# EAGLE board Bubbler Solenoid (EAGLE 6.4)
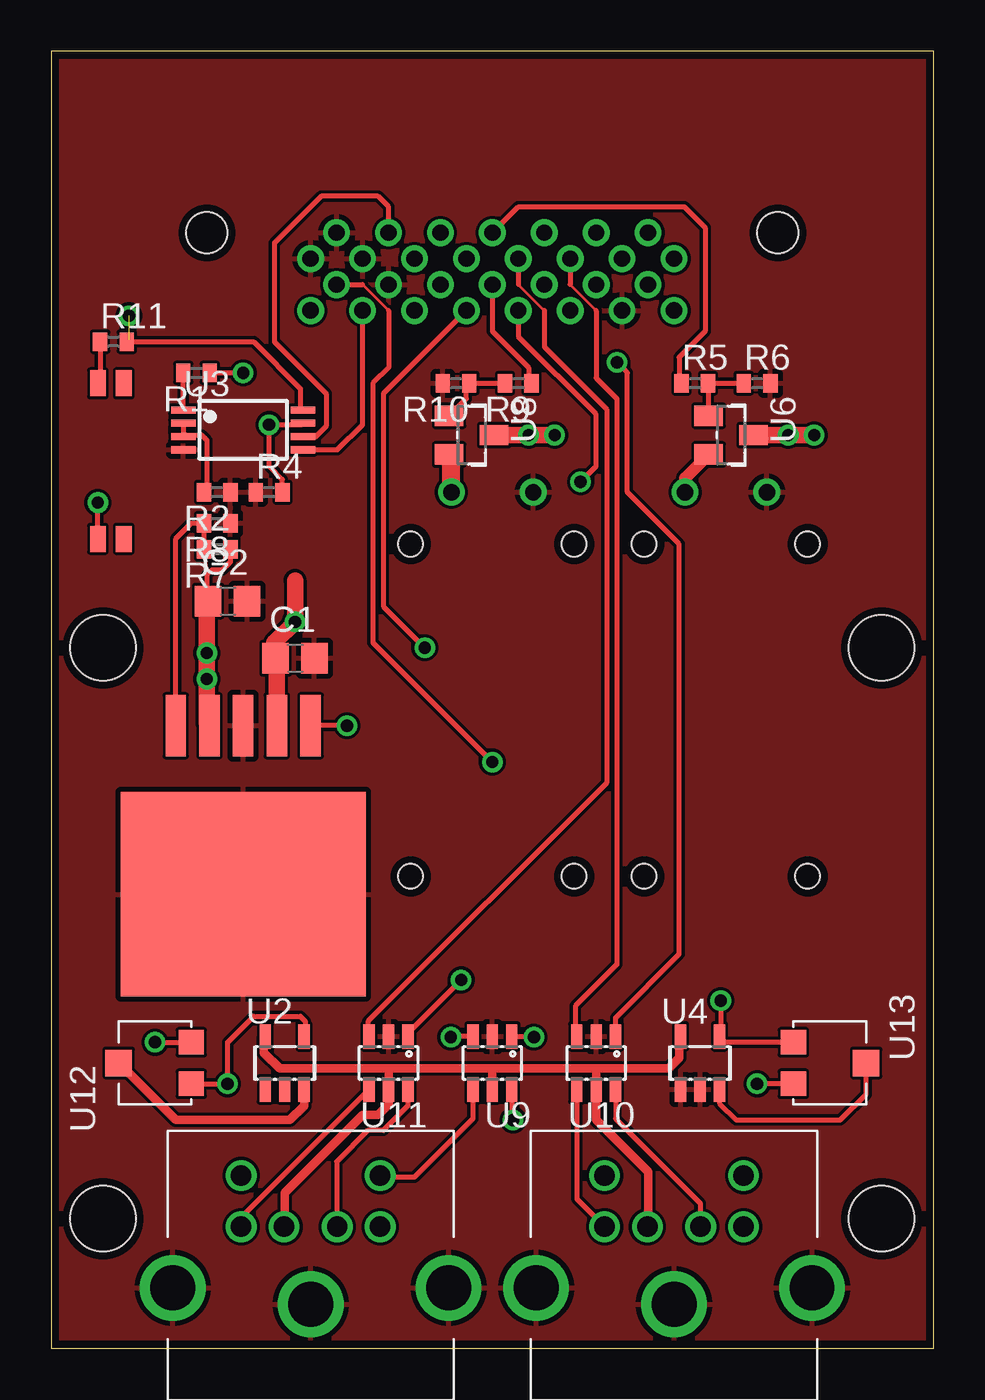
[diagram p0: board, top side]
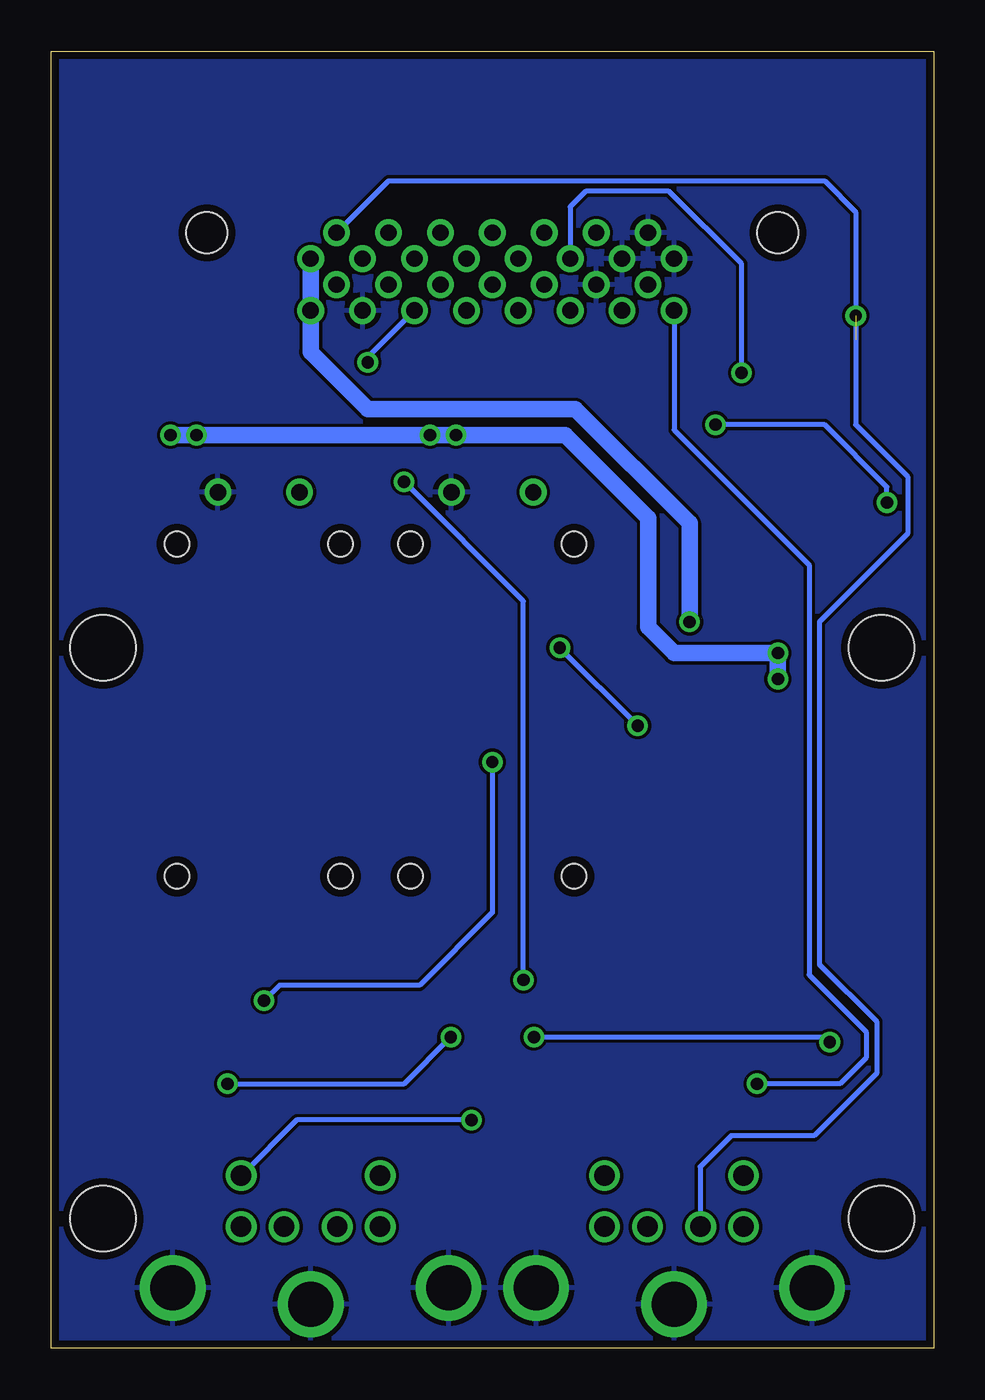
[diagram p1: board, bottom side, seen from below]

Size 43.18 x 63.5 mm. Coordinates in mm from the lower left corner, seen from the top.
Outline: 0,0 43.18,0 43.18,63.5 0,63.5 0,0
Copper layers (1*16): Top 0.035mm / dielectric 1.5mm / Bottom 0.035mm
Design rules "PDX (Prototyping)": minimum track width 6mil, minimum drill 13mil, track to track 6mil, track to pad 6mil, pad to pad 4mil, via to via 6mil, smd to smd 4mil, copper to edge 15mil, drill to drill 6mil, minimum pad ring 10mil, minimum via ring 8mil, stop-mask expansion 4mil, vias tented up to drill 0mil, thermal gap 10mil
Holes 3.2 mm at 2.54,34.29 40.64,34.29 2.54,6.35 40.64,6.35

## Footprints (pad centres in the part's own frame; a part is rotated, then mirrored left to right if it is on the bottom)
C0805 = smd 1.3 x 1.5: 1 -0.95,0; 2 0.95,0
R0402 = smd 0.7 x 0.9: 1 -0.65,0; 2 0.65,0
CONNECTOR-JAE-TX24-30M = drill 0.8: P1 -8.89,3.81; P2 -8.89,1.27; P3 -7.62,2.54; P4 -7.62,0; P5 -6.35,3.81; P6 -6.35,1.27; P7 -5.08,2.54; P8 -5.08,0; P9 -3.81,3.81; P10 -3.81,1.27; P11 -2.54,2.54; P12 -2.54,0; P13 -1.27,3.81; P14 -1.27,1.27; P15 0,2.54; P16 0,0; P17 1.27,3.81; P18 1.27,1.27; P19 2.54,2.54; P20 2.54,0; P21 3.81,3.81; P22 3.81,1.27; P23 5.08,2.54; P24 5.08,0; P25 6.35,3.81; P26 6.35,1.27; P27 7.62,2.54; P28 7.62,0; P29 8.89,3.81; P30 8.89,1.27 | hole 2: -13.97,0; 13.97,0
SOT23-5L = smd 0.55 x 1.2: 1 -0.95,-1.3; 2 0,-1.3; 3 0.95,-1.3; 4 0.95,1.3; 5 -0.95,1.3
TSSOP8 = smd 1.2 x 0.35: 1 -2.925,0.975; 2 -2.925,0.325; 3 -2.925,-0.325; 4 -2.925,-0.975; 5 2.925,-0.975; 6 2.925,-0.325; 7 2.925,0.325; 8 2.925,0.975
SWITCH-DIP-GDH-02 = smd 0.762 x 1.27: P1 0,0; P2 1.27,0; P3 1.27,7.62; P4 0,7.62
DUBLIB_SOT23 = smd 1 x 1.4: 1 -0.95,-1.1; 2 0.95,-1.1; 3 0,1.1
SOT23-6L = smd 0.55 x 1.2: 1 -0.95,-1.3; 2 0,-1.3; 3 0.95,-1.3; 4 0.95,1.3; 5 0,1.3; 6 -0.95,1.3
TC73X = smd 1.194 x 1.245: P$1 -1.016,-1.778; P$3 1.016,-1.778 | smd 1.295 x 1.295: P$2 0,1.778
KMDLX-6S-BS = drill 2.2: GND1 0,-4.7; GND2 -6.75,-5.5; GND3 6.75,-5.5 | drill 1: P1 1.3,-8.5; P2 -1.3,-8.5; P3 3.4,-8.5; P5 -3.4,-8.5; P6 3.4,-11; P8 -3.4,-11
P2PAK/A = smd 1 x 3: P1 0,0; P2 1.65,0; P3 3.3,0; P4 4.95,0; P5 6.6,0 | smd 12 x 10: PAD 3.3,8.25
PARKER-XVALVE-8MM = drill 0.8: P1 -2,0; P2 2,0 | hole 1.2: -4,-2.54; 4,-2.54; -4,-18.8; 4,-18.8

## Placement (x,y rotation side)
C1  [C0805]  11.94,33.78 0 top
C2  [C0805]  8.64,36.58 0 top
R1  10K  [R0402]  7.11,47.75 180 top
R2  10K  [R0402]  8.13,41.91 180 top
R4  10K  [R0402]  10.67,41.91 0 top
R5  1K  [R0402]  31.5,47.24 0 top
R6  47K  [R0402]  34.54,47.24 0 top
R7  [R0402]  8.13,39.12 180 top
R8  [R0402]  8.13,40.39 180 top
R9  1K  [R0402]  22.86,47.24 180 top
R10  47K  [R0402]  19.81,47.24 180 top
R11  10K  [R0402]  3.05,49.28 0 top
U1  BUBBLER_CARD  [CONNECTOR-JAE-TX24-30M]  21.59,54.61 180 top
U2  OPAMP-ST-LMV321ILT  [SOT23-5L]  11.43,13.97 0 top
U3  EEPROM-ST-M24C64  [TSSOP8]  9.4,44.96 0 top
U4  OPAMP-ST-LMV321ILT  [SOT23-5L]  31.75,13.97 0 top
U5  SWITCH-DIP-GDH-02  [SWITCH-DIP-GDH-02]  2.29,39.62 0 top
U6  BIPOLAR-PMBT6428  [DUBLIB_SOT23]  33.27,44.7 270 top
U8  BIPOLAR-PMBT6428  [DUBLIB_SOT23]  20.57,44.7 270 top
U9  USBLC6-2  [SOT23-6L]  21.59,13.97 180 top
U10  USBLC6-2  [SOT23-6L]  26.67,13.97 180 top
U11  USBLC6-2  [SOT23-6L]  16.51,13.97 180 top
U12  BOURNES-TC73  [TC73X]  5.08,13.97 90 top
U13  BOURNES-TC73  [TC73X]  38.1,13.97 270 top
U$1  KMDLX-6S-BS  [KMDLX-6S-BS]  30.48,-2.54 180 top
U$3  LD29300P2MTR  [P2PAK/A]  12.7,30.48 180 top
U$4  KMDLX-6S-BS  [KMDLX-6S-BS]  12.7,-2.54 180 top
U$5  PARKER-XVALVE-8MM  [PARKER-XVALVE-8MM]  33.02,41.91 0 top
U$7  PARKER-XVALVE-8MM  [PARKER-XVALVE-8MM]  21.59,41.91 0 top

## Library data of the parts
C1 C2 R1 R2 R4-R11 = rcl
U1-U6 U8-U13 U$1 U$3-U$5 U$7 = Pygmy

## Nets
3.3V: R11.2 U1.P4 U2.5 U3.8 U4.5 U9.5 U10.5 U11.5 U$1.P1 U$4.P1
5V: C2.1 R7.1 U6.3 U8.3 U$3.P4
ANALOG0: U1.P27 U4.4 U13.P$1
ANALOG1: U1.P29 U2.4 U12.P$1
CARD_ID: R1.1 U1.P22
CARD_SCL: U1.P24 U3.6
CARD_SDA: U1.P25 U3.5
GND: C1.2 C2.2 R2.1 R4.1 R6.2 R8.1 R10.2 U1.P5 U1.P23 U1.P26 U1.P28 U1.P30 U3.4 U4.1 U4.2 U9.2 U10.2 U11.2 U$1.GND1 U$1.GND2 U$1.GND3 U$3.P3 U$3.PAD U$4.GND1 U$4.GND2 U$4.GND3 U$5.P2 U$7.P2
N$1: U6.2 U$5.P1
N$2: U1.P9 U10.1
N$3: R5.2 R6.1 U6.1
N$4: U8.2 U$7.P1
N$5: U9.1 U13.P$3
N$6: R9.2 R10.1 U8.1
N$7: U2.3 U12.P$2
N$8: U9.3 U12.P$3
N$9: U1.P10 U10.3
N$10: U1.P13 U11.1
N$11: U1.P14 U11.3
N$12: U9.6 U$1.P8
N$13: U9.4 U$4.P8
N$14: U1.P17 U$3.P1
N$15: U4.3 U13.P$2
N$16: R7.2 R8.2 U$3.P5
N$17: R2.2 U3.2 U3.3
N$19: R1.2 U3.1
N$20: R11.1 U5.P4
N$21: R4.2 U3.7 U5.P1
RX0: U10.4 U$1.P3
RX1: U11.4 U$4.P3
SOLENOID0: R9.1 U1.P15
SOLENOID1: R5.1 U1.P16
TX0: U10.6 U$1.P2
TX1: U11.6 U$4.P2
VIN: C1.1 U1.P1 U1.P2 U$3.P2

## Tracks (layer width: path | path; a pad name or v marks a point on that pad's centre or on a via)
3.3V  (via drill 0.6)  (1 unrouted)
  Top 0.254: U3.8 12.19,46.06 12.19,46.99 9.91,49.28 R11.2 3.81,49.39
  Top 0.406: U$1.P1 29.21,5.99 29.21,8.64 26.67,11.18 U10.5 26.67,13.72 | U2.5 10.41,15.2 10.41,14.48 11.18,13.72 16.51,13.72 | 16.51,13.72 21.59,13.72 | 21.59,13.72 26.67,13.72 | 26.67,13.72 30.23,13.72 30.73,14.22 30.73,15.2 U4.5 | U9.5 21.59,13.72 | 16.51,13.72 U11.5 16.51,11.94 16,11.43 15.24,11.43 11.43,7.62 11.43,5.99 U$4.P1
  Bottom 0.254: U1.P4 26.67,57.15 5.33,57.15 3.81,55.63 v3.81,50.55 3.81,45.21 1.27,42.67 1.27,39.88 5.59,35.56 5.59,18.8 2.79,16 2.79,13.46 5.84,10.41 9.91,10.41 11.43,8.89 11.43,5.99 U$4.P1
5V  (via drill 0.6)
  Top 0.254: R7.1 8.78,38.5 8.38,38.1 7.87,38.1 7.62,37.85 7.62,36.64 C2.1
  Top 0.813: U6.3 v36.07,44.7 v37.34,44.7 | U$3.P4 7.62,30.61 v7.62,32.77 v7.62,34.04 7.62,36.51 C2.1 | U8.3 v23.37,44.7 v24.64,44.7
  Bottom 0.813: v37.34,44.7 v36.07,44.7 v24.64,44.7 v23.37,44.7 18.03,44.7 13.97,40.64 13.97,35.31 12.7,34.04 v7.62,34.04 v7.62,32.77
ANALOG0  (via drill 0.6)
  Top 0.152: 15.24,52.07 16.51,50.8
  Top 0.254: U13.P$1 32.98,14.99 U4.4 32.77,15.34 v32.77,17.02 | U1.P27 15.24,52.07 | 16.51,50.8 16.51,48.01 15.75,47.24 15.75,34.54 v21.59,28.7
  Bottom 0.254: v21.59,28.7 21.59,21.34 25.15,17.78 32,17.78 v32.77,17.02
ANALOG1  (via drill 0.6)
  Top 0.254: U2.4 12.45,15.34 12.45,16 12.19,16.26 9.91,16.26 8.64,14.99 v8.64,12.95 U12.P$1
  Bottom 0.254: U1.P29 12.7,44.96 6.1,38.35 6.1,18.29 3.3,15.49 3.3,14.22 4.57,12.95 v8.64,12.95
CARD_ID  (via drill 0.6)
  Top 0.254: R1.1 v9.4,47.75
  Bottom 0.254: v9.4,47.75 9.4,53.09 12.95,56.64 17.02,56.64 17.78,55.88 U1.P22
CARD_SCL
  Top 0.254: U1.P24 16.51,55.88 16,56.39 13.21,56.39 10.92,54.1 10.92,49.28 13.46,46.74 13.46,45.14 12.95,44.63 12.37,44.63 U3.6
CARD_SDA
  Top 0.254: U3.5 14.01,43.98 15.24,45.21 U1.P25
GND
  pour Bottom: -2.54,66.04 45.72,66.04 45.72,-2.54 -2.54,-2.54
  pour Top: -1.27,64.77 44.45,64.77 44.45,-1.27 -1.27,-1.27
N$1
  Top 0.61: U$5.P1 31.02,42.6 U6.2
N$2  (via drill 0.6)
  Top 0.254: U10.1 27.62,16.19 30.73,19.3 30.73,39.37 28.19,41.91 28.19,47.75 v27.69,48.26
  Bottom 0.254: v27.69,48.26 27.69,48.51 U1.P9
N$3
  Top 0.254: R6.1 R5.2 32.15,45.68 U6.1
N$4
  Top 0.889: U$7.P1 19.59,43.64 U8.2
N$5  (via drill 0.6)
  Top 0.254: U13.P$3 v34.54,12.95 | v23.62,15.24 22.57,15.24 U9.1
  Bottom 0.254: v34.54,12.95 25.91,12.95 v23.62,15.24
N$6
  Top 0.254: R9.2 R10.1 20.32,47.1 20.32,46.48 19.49,45.65 U8.1
N$7
  Top 0.406: U2.3 12.38,11.87 11.68,11.18 6.1,11.18 U12.P$2
N$8  (via drill 0.6)
  Top 0.254: U9.3 19.59,15.27 v19.56,15.24 | v5.08,14.99 U12.P$3
  Bottom 0.254: v19.56,15.24 5.33,15.24 v5.08,14.99
N$9
  Top 0.152: 25.4,52.07 26.67,50.8
  Top 0.254: U1.P10 25.4,52.07 | 26.67,50.8 26.67,47.5 27.69,46.48 27.69,18.8 25.65,16.76 25.65,15.34 U10.3
N$10  (via drill 0.6)
  Top 0.254: U11.1 17.46,15.43 v20.07,18.03 | v25.91,42.42 26.67,43.18 26.67,45.72 22.86,49.53 U1.P13
  Bottom 0.254: v20.07,18.03 20.07,36.58 v25.91,42.42
N$11
  Top 0.152: 22.86,52.07 24.13,50.8
  Top 0.254: U1.P14 22.86,52.07 | 24.13,50.8 24.13,49.02 27.18,45.97 27.18,27.69 15.49,16 15.49,15.34 U11.3
N$12  (via drill 0.6)
  Top 0.254: U9.6 22.54,11.24 v22.61,11.18
  Bottom 0.254: v22.61,11.18 31.16,11.18 U$1.P8
N$13
  Top 0.254: U9.4 20.64,11.24 17.78,8.38 16.18,8.38 U$4.P8
N$14  (via drill 0.6)
  Top 0.254: U1.P17 16.26,46.74 16.26,36.32 v18.29,34.29 | v14.48,30.48 U$3.P1
  Bottom 0.254: v18.29,34.29 v14.48,30.48
N$15
  Top 0.254: U4.3 32.7,12 33.53,11.18 38.61,11.18 39.88,12.45 U13.P$2
N$16
  Top 0.254: U$3.P5 6.1,39.63 6.86,40.39 R8.2 R7.2
N$17
  Top 0.254: U3.2 U3.3 6.53,44.63 6.6,44.7 7.37,44.7 7.62,44.45 7.62,42.05 R2.2
N$19
  Top 0.254: U3.1 6.47,47.74 R1.2
N$20
  Top 0.254: R11.1 2.4,47.36 U5.P4
N$21  (via drill 0.6)
  Top 0.254: U5.P1 v2.29,41.4 | U3.7 12.25,45.21 v10.67,45.21 10.67,43.18 11.32,42.53 R4.2
  Bottom 0.254: v2.29,41.4 2.29,42.16 5.33,45.21 v10.67,45.21
RX0
  Top 0.254: U10.4 25.72,7.32 U$1.P3
RX1
  Top 0.254: U$4.P3 9.3,6.41 U11.4
SOLENOID0
  Top 0.254: U1.P15 21.59,49.78 23.37,48.01 23.37,47.39 R9.1
SOLENOID1
  Top 0.254: U1.P16 22.86,55.88 30.99,55.88 32,54.86 32,49.78 30.73,48.51 30.73,47.36 R5.1
TX0
  Top 0.254: U10.6 27.62,11.24 31.75,7.11 31.75,5.99 U$1.P2
TX1
  Top 0.254: U11.6 17.46,11.87 16.26,10.67 15.49,10.67 13.97,9.14 13.97,5.99 U$4.P2
VIN  (via drill 0.6)
  Top 0.813: U$3.P2 11.05,33.72 C1.1 10.92,33.85 10.92,34.54 v11.94,35.56 11.94,37.59
  Bottom 0.813: U1.P2 U1.P1 30.48,48.77 27.69,45.97 17.53,45.97 11.94,40.39 v11.94,35.56

## Text on the board
Reference: 0.1 x 1.35 | 1.6 x 1.35 | 0.1 x 0.25 | 1.6 x 0.25